# EAGLE board Micro_Bit_Controller_Bit-Panel_v21 (EAGLE 9.5.2)
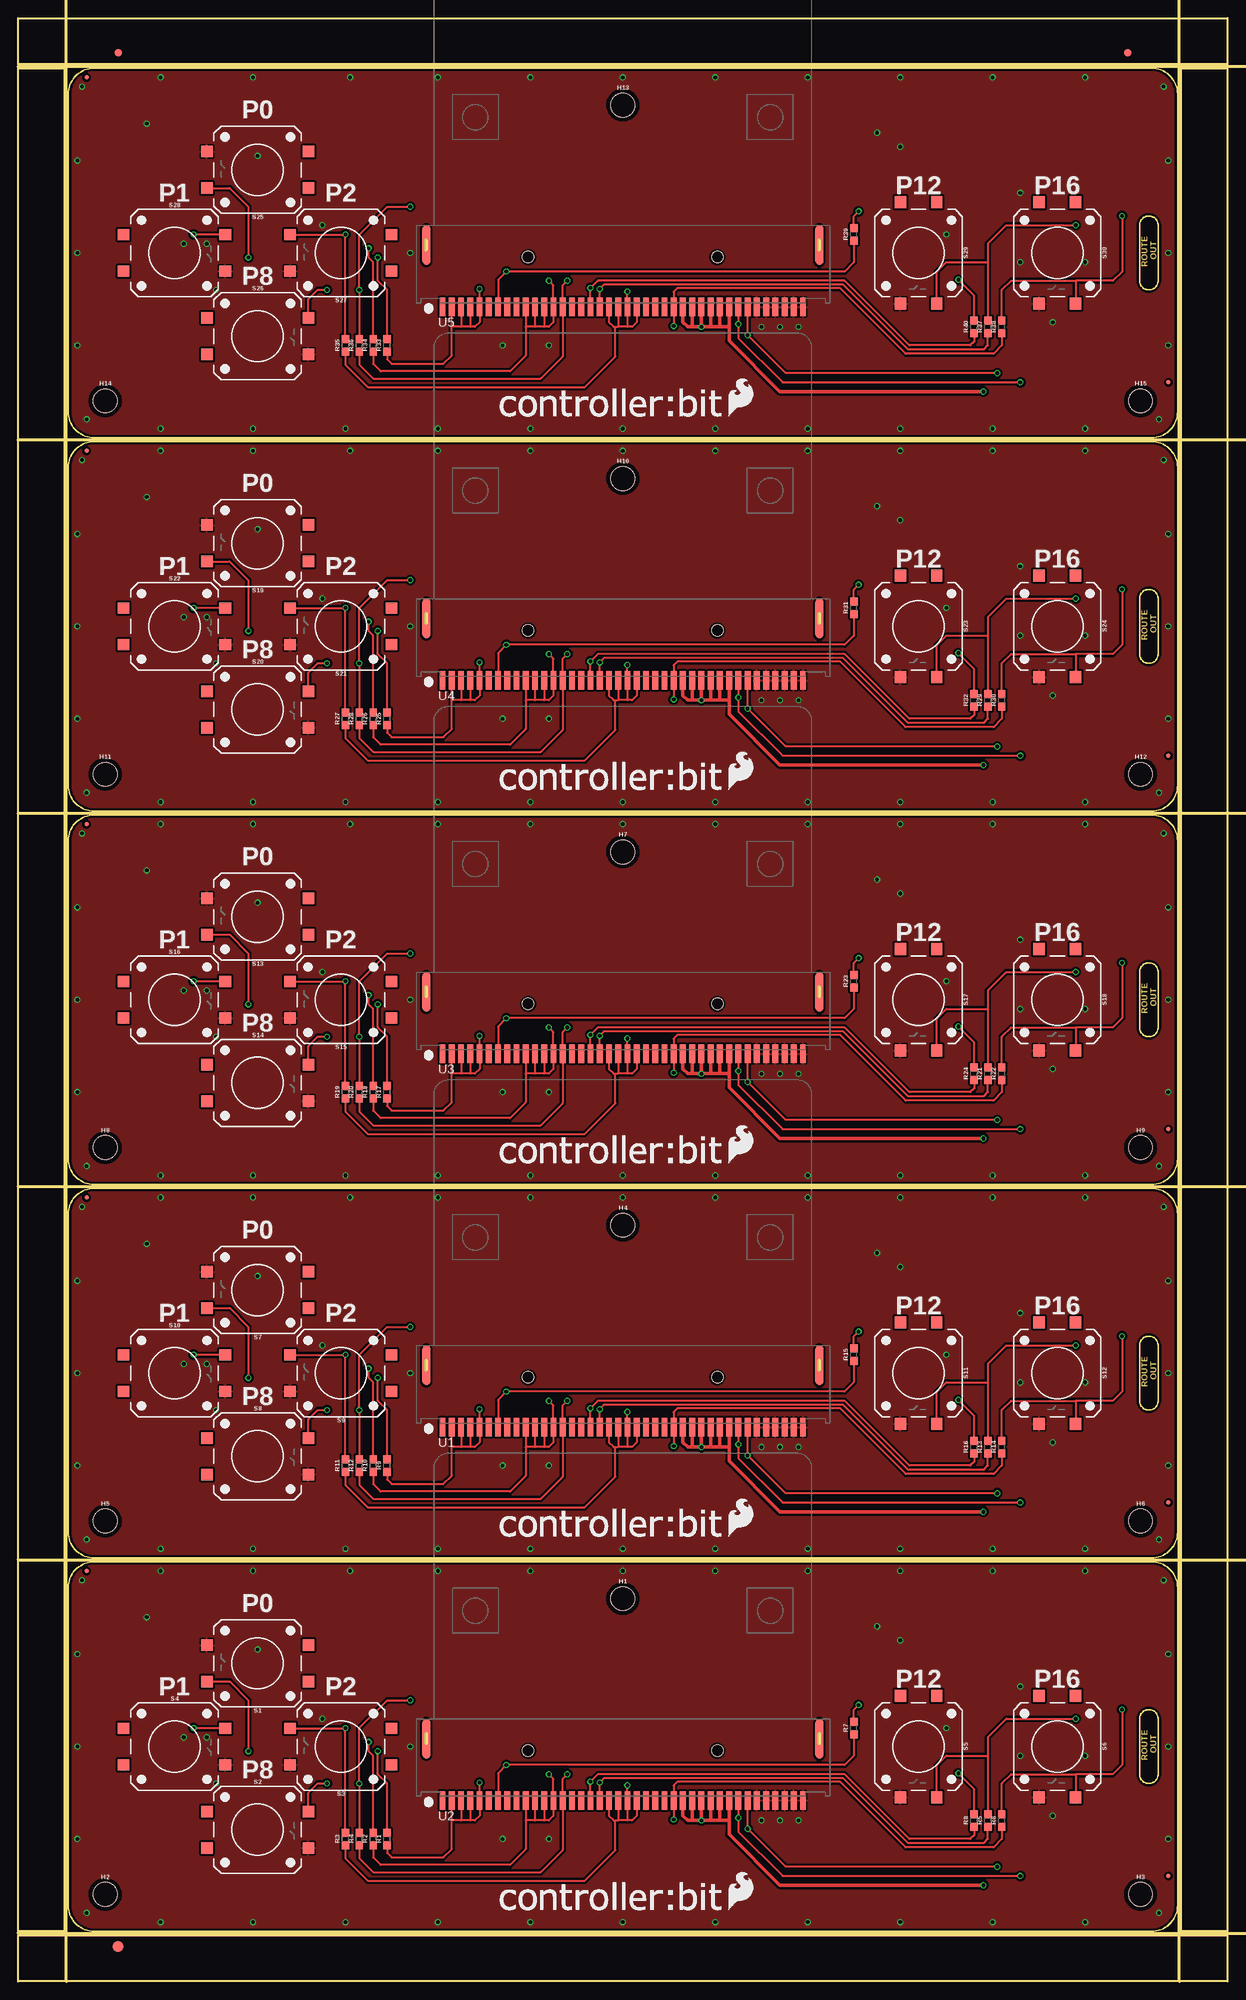
[diagram p0: board, top side]
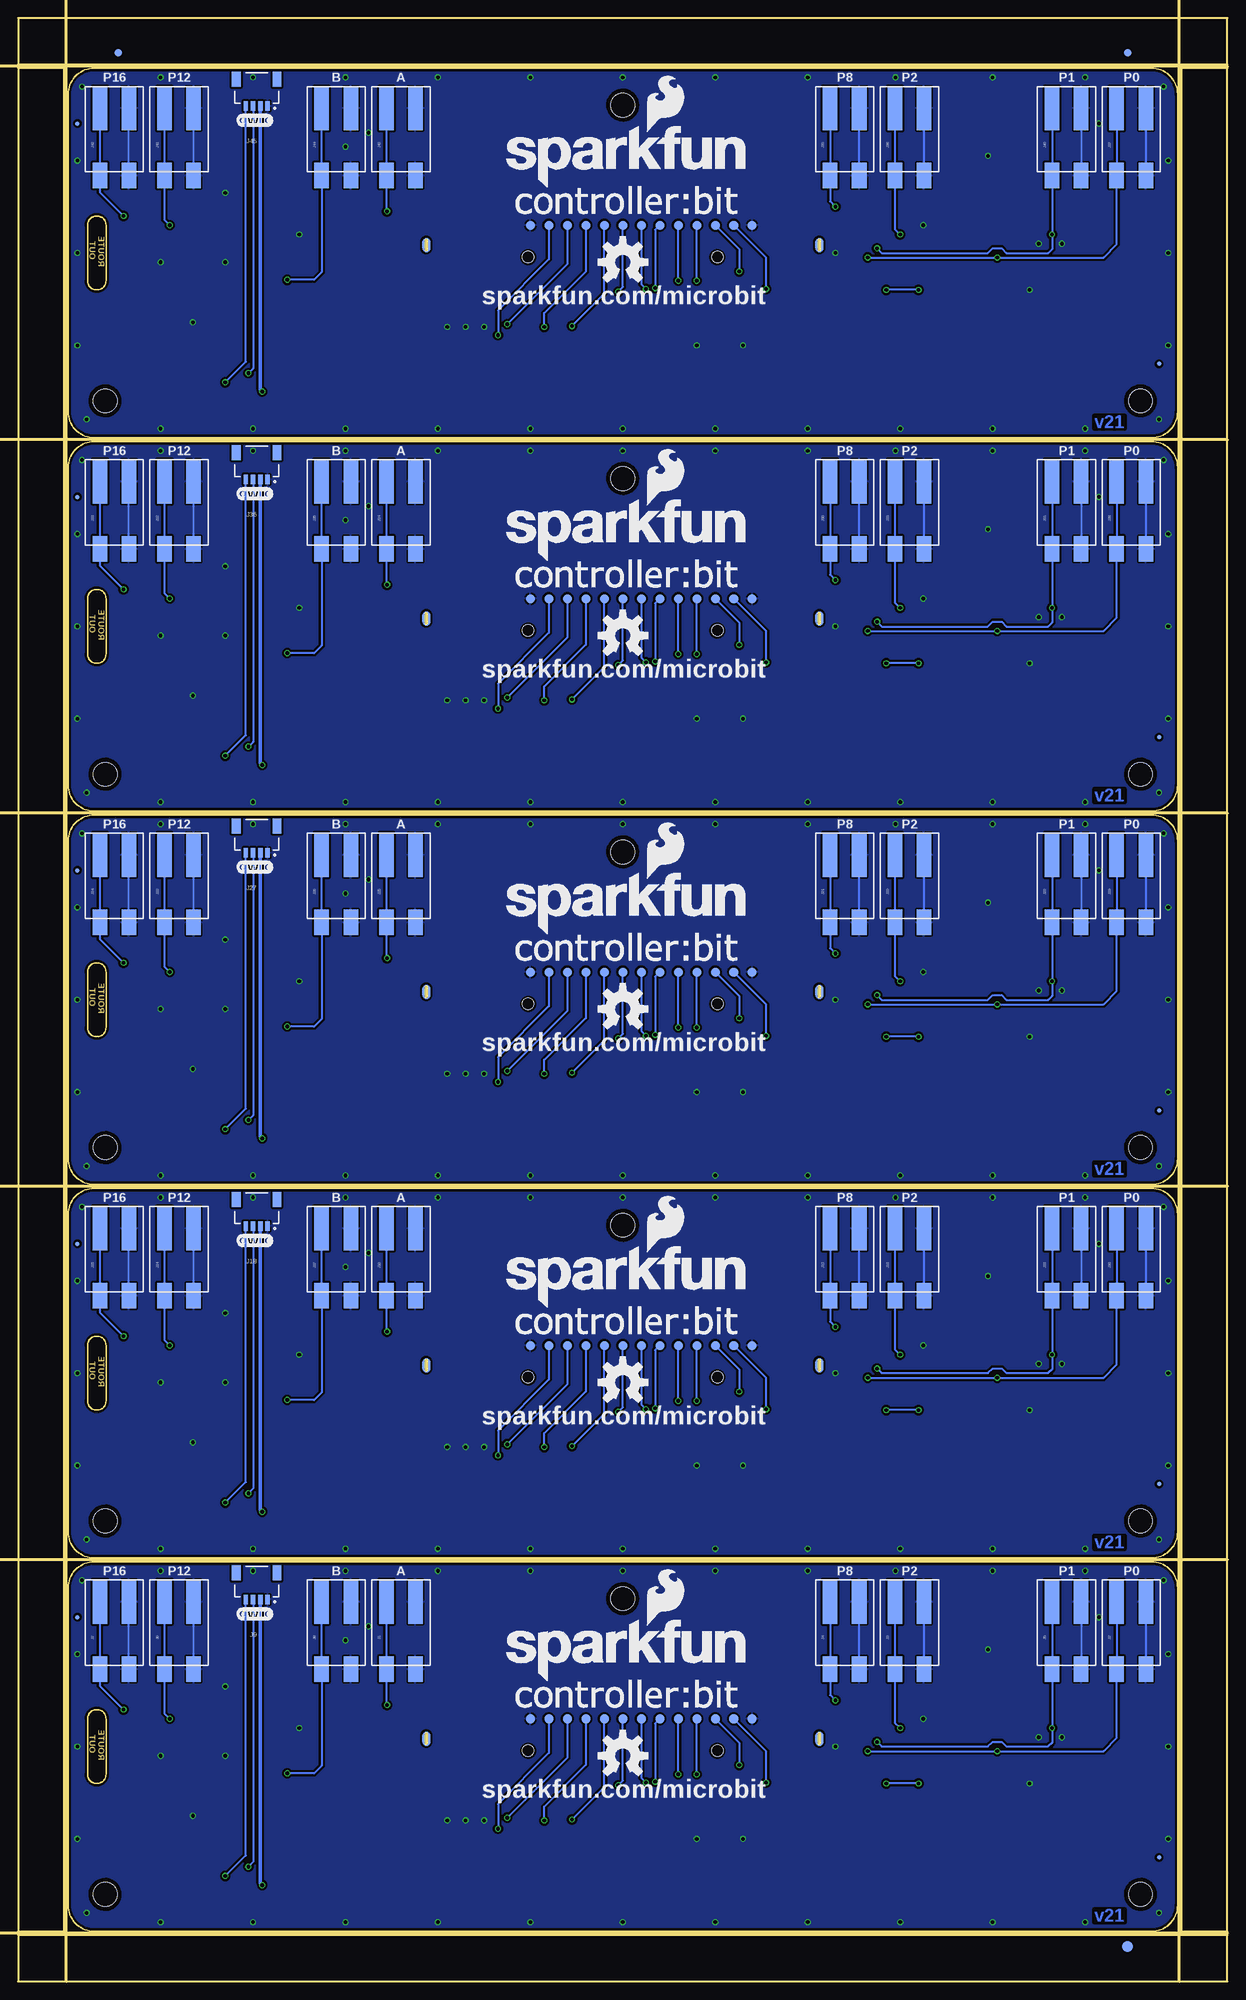
[diagram p1: board, bottom side, seen from below]

Size 166.12 x 269.75 mm. Coordinates in mm from the lower left corner, seen from the top.
Outline: 155.67,57.66 10.45,57.66 arc90 6.86,54.07 6.86,10.45 arc90 10.45,6.86 155.67,6.86 arc90 159.26,10.45 159.26,54.07 arc90 155.67,57.66
Outline: 156.59,36.07 156.59,28.45 arc-90 155.32,27.18 arc-90 154.05,28.45 154.05,36.07 arc-90 155.32,37.34 arc-90 156.59,36.07
Outline: 155.67,108.97 10.45,108.97 arc90 6.86,105.37 6.86,61.76 arc90 10.45,58.17 155.67,58.17 arc90 159.26,61.76 159.26,105.37 arc90 155.67,108.97
Outline: 156.59,87.38 156.59,79.76 arc-90 155.32,78.49 arc-90 154.05,79.76 154.05,87.38 arc-90 155.32,88.65 arc-90 156.59,87.38
Outline: 155.67,160.27 10.45,160.27 arc90 6.86,156.68 6.86,113.07 arc90 10.45,109.47 155.67,109.47 arc90 159.26,113.07 159.26,156.68 arc90 155.67,160.27
Outline: 156.59,138.68 156.59,131.06 arc-90 155.32,129.79 arc-90 154.05,131.06 154.05,138.68 arc-90 155.32,139.95 arc-90 156.59,138.68
Outline: 155.67,211.58 10.45,211.58 arc90 6.86,207.99 6.86,164.37 arc90 10.45,160.78 155.67,160.78 arc90 159.26,164.37 159.26,207.99 arc90 155.67,211.58
Outline: 156.59,189.99 156.59,182.37 arc-90 155.32,181.1 arc-90 154.05,182.37 154.05,189.99 arc-90 155.32,191.26 arc-90 156.59,189.99
Outline: 155.67,262.89 10.45,262.89 arc90 6.86,259.3 6.86,215.68 arc90 10.45,212.09 155.67,212.09 arc90 159.26,215.68 159.26,259.3 arc90 155.67,262.89
Outline: 156.59,241.3 156.59,233.68 arc-90 155.32,232.41 arc-90 154.05,233.68 154.05,241.3 arc-90 155.32,242.57 arc-90 156.59,241.3
Outline: 0,6.35 166.12,6.35 166.12,0 0,0 0,6.35
Outline: 159.77,262.89 166.12,262.89 166.12,6.86 159.77,6.86 159.77,262.89
Outline: 0,269.75 166.12,269.75 166.12,263.4 0,263.4 0,269.75
Outline: 0,262.89 6.35,262.89 6.35,6.86 0,6.86 0,262.89
Copper layers (1*16): Top 0.035mm / dielectric 1.5mm / Bottom 0.035mm
Design rules "SparkFun-2-layer-PCBWay-LIMIT": minimum track width 6mil, minimum drill 0.3mm, track to track 6mil, track to pad 6mil, pad to pad 6mil, via to via 6mil, smd to smd 6mil, copper to edge 6mil, drill to drill 6mil, minimum pad ring 6mil, minimum via ring 6mil, stop-mask expansion 4mil, vias tented up to drill 25mil, thermal gap 10mil
Milling: 8 lines

## Footprints (pad centres in the part's own frame; a part is rotated, then mirrored left to right if it is on the bottom)
FIDUCIAL-1X2 = smd 1 x 1: 1 0,0
FIDUCIAL-1.5X3 = smd 1.5 x 1.5: 1 0,0
FIDUCIAL-MICRO = smd 0.635 x 0.635: 1 0,0
STAND-OFF = hole 3.302: 0,0
1X02_POKEHOME = smd 3.5 x 2: P1 5.25,2; P2 5.25,-2 | smd 6 x 2: P3 -4,2; P4 -4,-2
JST04_1MM_RA = smd 0.6 x 1.35: 1 -1.5,0; 2 -0.5,0; 3 0.5,0; 4 1.5,0 | smd 1.2 x 2: NC1 2.8,-3.675; NC2 -2.8,-3.675
0603 = smd 1.1 x 1: 1 -0.85,0; 2 0.85,0
TACTILE_SWITCH_SMD_12MM = smd 1.6 x 1.55: 1 6.975,-2.5; 2 -6.975,-2.5; 3 6.975,2.5; 4 -6.975,2.5
PAD.03X.05 = smd 1.27 x 1.27: P$1 0,0
MICRO:BIT-RA_SMD = smd 0.8 x 2.5: P$1 -24.765,-6.15; P$2 -23.495,-6.15; P$3 -22.225,-6.15; P$4 -20.955,-6.15; P$5 -19.685,-6.15; P$6 -18.415,-6.15; P$7 -17.145,-6.15; P$8 -15.875,-6.15; P$9 -14.605,-6.15; P$10 -13.335,-6.15; P$11 -12.065,-6.15; P$12 -10.795,-6.15; P$13 -9.525,-6.15; P$14 -8.255,-6.15; P$15 -6.985,-6.15; P$16 -5.715,-6.15; P$17 -4.445,-6.15; P$18 -3.175,-6.15; P$19 -1.905,-6.15; P$20 -0.635,-6.15; P$21 0.635,-6.15; P$22 1.905,-6.15; P$23 3.175,-6.15; P$24 4.445,-6.15; P$25 5.715,-6.15; P$26 6.985,-6.15; P$27 8.255,-6.15; P$28 9.525,-6.15; P$29 10.795,-6.15; P$30 12.065,-6.15; P$31 13.335,-6.15; P$32 14.605,-6.15; P$33 15.875,-6.15; P$34 17.145,-6.15; P$35 18.415,-6.15; P$36 19.685,-6.15; P$37 20.955,-6.15; P$38 22.225,-6.15; P$39 23.495,-6.15; P$40 24.765,-6.15 | smd 1.1 x 5.5: P$42 -27,2.36; P$43 27,2.36 | smd 1.1 x 2 bottom: P$44 -27,2.36; P$45 27,2.36 | hole 1.6: 13,0.7; -13,0.7

## Placement (x,y rotation side)
E$1  [FIDUCIAL-1X2]  13.72,264.99 0 top
E$2  [FIDUCIAL-1X2]  13.72,264.99 0 bottom
E$3  [FIDUCIAL-1X2]  152.4,264.99 0 top
E$4  [FIDUCIAL-1X2]  152.4,264.99 0 bottom
E$5  [FIDUCIAL-1.5X3]  13.72,4.76 0 top
E$6  [FIDUCIAL-1.5X3]  13.72,4.76 0 bottom
FD1  FIDUCIALUFIDUCIAL  [FIDUCIAL-MICRO]  9.4,56.39 0 top
FD2  FIDUCIALUFIDUCIAL  [FIDUCIAL-MICRO]  157.99,14.48 0 top
FD3  FIDUCIALUFIDUCIAL  [FIDUCIAL-MICRO]  9.4,17.02 0 bottom
FD4  FIDUCIALUFIDUCIAL  [FIDUCIAL-MICRO]  157.99,50.04 0 bottom
FD5  FIDUCIALUFIDUCIAL  [FIDUCIAL-MICRO]  9.4,107.7 0 top
FD6  FIDUCIALUFIDUCIAL  [FIDUCIAL-MICRO]  157.99,65.79 0 top
FD7  FIDUCIALUFIDUCIAL  [FIDUCIAL-MICRO]  9.4,68.33 0 bottom
FD8  FIDUCIALUFIDUCIAL  [FIDUCIAL-MICRO]  157.99,101.35 0 bottom
FD9  FIDUCIALUFIDUCIAL  [FIDUCIAL-MICRO]  9.4,159 0 top
FD10  FIDUCIALUFIDUCIAL  [FIDUCIAL-MICRO]  157.99,117.09 0 top
FD11  FIDUCIALUFIDUCIAL  [FIDUCIAL-MICRO]  9.4,119.63 0 bottom
FD12  FIDUCIALUFIDUCIAL  [FIDUCIAL-MICRO]  157.99,152.65 0 bottom
FD13  FIDUCIALUFIDUCIAL  [FIDUCIAL-MICRO]  9.4,210.31 0 top
FD14  FIDUCIALUFIDUCIAL  [FIDUCIAL-MICRO]  157.99,168.4 0 top
FD15  FIDUCIALUFIDUCIAL  [FIDUCIAL-MICRO]  9.4,170.94 0 bottom
FD16  FIDUCIALUFIDUCIAL  [FIDUCIAL-MICRO]  157.99,203.96 0 bottom
FD17  FIDUCIALUFIDUCIAL  [FIDUCIAL-MICRO]  9.4,261.62 0 top
FD18  FIDUCIALUFIDUCIAL  [FIDUCIAL-MICRO]  157.99,219.71 0 top
FD19  FIDUCIALUFIDUCIAL  [FIDUCIAL-MICRO]  9.4,222.25 0 bottom
FD20  FIDUCIALUFIDUCIAL  [FIDUCIAL-MICRO]  157.99,255.27 0 bottom
H1  STAND-OFF  [STAND-OFF]  83.06,52.58 0 top
H2  STAND-OFF  [STAND-OFF]  11.94,11.94 0 top
H3  STAND-OFF  [STAND-OFF]  154.18,11.94 0 top
H4  STAND-OFF  [STAND-OFF]  83.06,103.89 0 top
H5  STAND-OFF  [STAND-OFF]  11.94,63.25 0 top
H6  STAND-OFF  [STAND-OFF]  154.18,63.25 0 top
H7  STAND-OFF  [STAND-OFF]  83.06,155.19 0 top
H8  STAND-OFF  [STAND-OFF]  11.94,114.55 0 top
H9  STAND-OFF  [STAND-OFF]  154.18,114.55 0 top
H10  STAND-OFF  [STAND-OFF]  83.06,206.5 0 top
H11  STAND-OFF  [STAND-OFF]  11.94,165.86 0 top
H12  STAND-OFF  [STAND-OFF]  154.18,165.86 0 top
H13  STAND-OFF  [STAND-OFF]  83.06,257.81 0 top
H14  STAND-OFF  [STAND-OFF]  11.94,217.17 0 top
H15  STAND-OFF  [STAND-OFF]  154.18,217.17 0 top
J1  Pokehome  [1X02_POKEHOME]  113.54,48.13 270 bottom
J2  Pokehome  [1X02_POKEHOME]  13.21,48.13 270 bottom
J3  Pokehome  [1X02_POKEHOME]  43.69,48.13 270 bottom
J4  Pokehome  [1X02_POKEHOME]  52.58,48.13 270 bottom
J5  Pokehome  [1X02_POKEHOME]  22.1,48.13 270 bottom
J6  Pokehome  [1X02_POKEHOME]  144.02,48.13 270 bottom
J7  Pokehome  [1X02_POKEHOME]  152.91,48.13 270 bottom
J8  Pokehome  [1X02_POKEHOME]  122.43,48.13 270 bottom
J9  QWIIC_RA  [JST04_1MM_RA]  133.35,52.45 180 bottom
J10  Pokehome  [1X02_POKEHOME]  13.21,99.44 270 bottom
J11  Pokehome  [1X02_POKEHOME]  43.69,99.44 270 bottom
J12  Pokehome  [1X02_POKEHOME]  52.58,99.44 270 bottom
J13  Pokehome  [1X02_POKEHOME]  22.1,99.44 270 bottom
J14  Pokehome  [1X02_POKEHOME]  144.02,99.44 270 bottom
J15  Pokehome  [1X02_POKEHOME]  152.91,99.44 270 bottom
J16  Pokehome  [1X02_POKEHOME]  113.54,99.44 270 bottom
J17  Pokehome  [1X02_POKEHOME]  122.43,99.44 270 bottom
J18  QWIIC_RA  [JST04_1MM_RA]  133.35,103.76 180 bottom
J19  Pokehome  [1X02_POKEHOME]  13.21,150.75 270 bottom
J20  Pokehome  [1X02_POKEHOME]  43.69,150.75 270 bottom
J21  Pokehome  [1X02_POKEHOME]  52.58,150.75 270 bottom
J22  Pokehome  [1X02_POKEHOME]  22.1,150.75 270 bottom
J23  Pokehome  [1X02_POKEHOME]  144.02,150.75 270 bottom
J24  Pokehome  [1X02_POKEHOME]  152.91,150.75 270 bottom
J25  Pokehome  [1X02_POKEHOME]  113.54,150.75 270 bottom
J26  Pokehome  [1X02_POKEHOME]  122.43,150.75 270 bottom
J27  QWIIC_RA  [JST04_1MM_RA]  133.35,155.07 180 bottom
J28  Pokehome  [1X02_POKEHOME]  13.21,202.06 270 bottom
J29  Pokehome  [1X02_POKEHOME]  43.69,202.06 270 bottom
J30  Pokehome  [1X02_POKEHOME]  52.58,202.06 270 bottom
J31  Pokehome  [1X02_POKEHOME]  22.1,202.06 270 bottom
J32  Pokehome  [1X02_POKEHOME]  144.02,202.06 270 bottom
J33  Pokehome  [1X02_POKEHOME]  152.91,202.06 270 bottom
J34  Pokehome  [1X02_POKEHOME]  113.54,202.06 270 bottom
J35  Pokehome  [1X02_POKEHOME]  122.43,202.06 270 bottom
J36  QWIIC_RA  [JST04_1MM_RA]  133.35,206.38 180 bottom
J37  Pokehome  [1X02_POKEHOME]  13.21,253.37 270 bottom
J38  Pokehome  [1X02_POKEHOME]  43.69,253.37 270 bottom
J39  Pokehome  [1X02_POKEHOME]  52.58,253.37 270 bottom
J40  Pokehome  [1X02_POKEHOME]  22.1,253.37 270 bottom
J41  Pokehome  [1X02_POKEHOME]  144.02,253.37 270 bottom
J42  Pokehome  [1X02_POKEHOME]  152.91,253.37 270 bottom
J43  Pokehome  [1X02_POKEHOME]  113.54,253.37 270 bottom
J44  Pokehome  [1X02_POKEHOME]  122.43,253.37 270 bottom
J45  QWIIC_RA  [JST04_1MM_RA]  133.35,257.68 180 bottom
LOGO1  SFE_LOGO_FLAME.2_INCH  [SFE_LOGO_FLAME_.2]  97.25,9.59 0 top
LOGO2  OSHW-LOGOL  [OSHW-LOGO-L]  83.06,30.99 0 bottom
LOGO3  SFE_LOGO_NAME_FLAME.3_INCH  [SFE_LOGO_NAME_FLAME_.3]  99.57,41.15 0 bottom
LOGO4  SFE_LOGO_FLAME.2_INCH  [SFE_LOGO_FLAME_.2]  97.25,60.9 0 top
LOGO5  OSHW-LOGOL  [OSHW-LOGO-L]  83.06,82.3 0 bottom
LOGO6  SFE_LOGO_NAME_FLAME.3_INCH  [SFE_LOGO_NAME_FLAME_.3]  99.57,92.46 0 bottom
LOGO7  SFE_LOGO_FLAME.2_INCH  [SFE_LOGO_FLAME_.2]  97.25,112.2 0 top
LOGO8  OSHW-LOGOL  [OSHW-LOGO-L]  83.06,133.6 0 bottom
LOGO9  SFE_LOGO_NAME_FLAME.3_INCH  [SFE_LOGO_NAME_FLAME_.3]  99.57,143.76 0 bottom
LOGO10  SFE_LOGO_FLAME.2_INCH  [SFE_LOGO_FLAME_.2]  97.25,163.51 0 top
LOGO11  OSHW-LOGOL  [OSHW-LOGO-L]  83.06,184.91 0 bottom
LOGO12  SFE_LOGO_NAME_FLAME.3_INCH  [SFE_LOGO_NAME_FLAME_.3]  99.57,195.07 0 bottom
LOGO13  SFE_LOGO_FLAME.2_INCH  [SFE_LOGO_FLAME_.2]  97.25,214.82 0 top
LOGO14  OSHW-LOGOL  [OSHW-LOGO-L]  83.06,236.22 0 bottom
LOGO15  SFE_LOGO_NAME_FLAME.3_INCH  [SFE_LOGO_NAME_FLAME_.3]  99.57,246.38 0 bottom
R1  2.2k  [0603]  50.67,19.56 90 top
R2  2.2k  [0603]  48.77,19.56 90 top
R3  2.2k  [0603]  44.96,19.56 90 top
R4  2.2k  [0603]  46.86,19.56 90 top
R5  2.2k  [0603]  133.22,22.1 90 top
R6  2.2k  [0603]  135.13,22.1 90 top
R7  2.2k  [0603]  114.81,34.8 90 top
R8  2.2k  [0603]  131.32,22.1 90 top
R9  2.2k  [0603]  50.67,70.87 90 top
R10  2.2k  [0603]  48.77,70.87 90 top
R11  2.2k  [0603]  44.96,70.87 90 top
R12  2.2k  [0603]  46.86,70.87 90 top
R13  2.2k  [0603]  133.22,73.41 90 top
R14  2.2k  [0603]  135.13,73.41 90 top
R15  2.2k  [0603]  114.81,86.11 90 top
R16  2.2k  [0603]  131.32,73.41 90 top
R17  2.2k  [0603]  50.67,122.17 90 top
R18  2.2k  [0603]  48.77,122.17 90 top
R19  2.2k  [0603]  44.96,122.17 90 top
R20  2.2k  [0603]  46.86,122.17 90 top
R21  2.2k  [0603]  133.22,124.71 90 top
R22  2.2k  [0603]  135.13,124.71 90 top
R23  2.2k  [0603]  114.81,137.41 90 top
R24  2.2k  [0603]  131.32,124.71 90 top
R25  2.2k  [0603]  50.67,173.48 90 top
R26  2.2k  [0603]  48.77,173.48 90 top
R27  2.2k  [0603]  44.96,173.48 90 top
R28  2.2k  [0603]  46.86,173.48 90 top
R29  2.2k  [0603]  133.22,176.02 90 top
R30  2.2k  [0603]  135.13,176.02 90 top
R31  2.2k  [0603]  114.81,188.72 90 top
R32  2.2k  [0603]  131.32,176.02 90 top
R33  2.2k  [0603]  50.67,224.79 90 top
R34  2.2k  [0603]  48.77,224.79 90 top
R35  2.2k  [0603]  44.96,224.79 90 top
R36  2.2k  [0603]  46.86,224.79 90 top
R37  2.2k  [0603]  133.22,227.33 90 top
R38  2.2k  [0603]  135.13,227.33 90 top
R39  2.2k  [0603]  114.81,240.03 90 top
R40  2.2k  [0603]  131.32,227.33 90 top
S1  TACT  [TACTILE_SWITCH_SMD_12MM]  32.89,43.69 180 top
S2  TACT  [TACTILE_SWITCH_SMD_12MM]  32.89,20.83 0 top
S3  TACT  [TACTILE_SWITCH_SMD_12MM]  44.32,32.26 180 top
S4  TACT  [TACTILE_SWITCH_SMD_12MM]  21.46,32.26 0 top
S5  TACT  [TACTILE_SWITCH_SMD_12MM]  123.7,32.26 270 top
S6  TACT  [TACTILE_SWITCH_SMD_12MM]  142.75,32.26 270 top
S7  TACT  [TACTILE_SWITCH_SMD_12MM]  32.89,95 180 top
S8  TACT  [TACTILE_SWITCH_SMD_12MM]  32.89,72.14 0 top
S9  TACT  [TACTILE_SWITCH_SMD_12MM]  44.32,83.57 180 top
S10  TACT  [TACTILE_SWITCH_SMD_12MM]  21.46,83.57 0 top
S11  TACT  [TACTILE_SWITCH_SMD_12MM]  123.7,83.57 270 top
S12  TACT  [TACTILE_SWITCH_SMD_12MM]  142.75,83.57 270 top
S13  TACT  [TACTILE_SWITCH_SMD_12MM]  32.89,146.3 180 top
S14  TACT  [TACTILE_SWITCH_SMD_12MM]  32.89,123.44 0 top
S15  TACT  [TACTILE_SWITCH_SMD_12MM]  44.32,134.87 180 top
S16  TACT  [TACTILE_SWITCH_SMD_12MM]  21.46,134.87 0 top
S17  TACT  [TACTILE_SWITCH_SMD_12MM]  123.7,134.87 270 top
S18  TACT  [TACTILE_SWITCH_SMD_12MM]  142.75,134.87 270 top
S19  TACT  [TACTILE_SWITCH_SMD_12MM]  32.89,197.61 180 top
S20  TACT  [TACTILE_SWITCH_SMD_12MM]  32.89,174.75 0 top
S21  TACT  [TACTILE_SWITCH_SMD_12MM]  44.32,186.18 180 top
S22  TACT  [TACTILE_SWITCH_SMD_12MM]  21.46,186.18 0 top
S23  TACT  [TACTILE_SWITCH_SMD_12MM]  123.7,186.18 270 top
S24  TACT  [TACTILE_SWITCH_SMD_12MM]  142.75,186.18 270 top
S25  TACT  [TACTILE_SWITCH_SMD_12MM]  32.89,248.92 180 top
S26  TACT  [TACTILE_SWITCH_SMD_12MM]  32.89,226.06 0 top
S27  TACT  [TACTILE_SWITCH_SMD_12MM]  44.32,237.49 180 top
S28  TACT  [TACTILE_SWITCH_SMD_12MM]  21.46,237.49 0 top
S29  TACT  [TACTILE_SWITCH_SMD_12MM]  123.7,237.49 270 top
S30  TACT  [TACTILE_SWITCH_SMD_12MM]  142.75,237.49 270 top
TP1  TEST-POINT3X5  [PAD.03X.05]  88.14,36.07 90 bottom
TP2  TEST-POINT3X5  [PAD.03X.05]  95.76,36.07 90 bottom
TP3  TEST-POINT3X5  [PAD.03X.05]  65.28,36.07 90 bottom
TP4  TEST-POINT3X5  [PAD.03X.05]  93.22,36.07 90 bottom
TP5  TEST-POINT3X5  [PAD.03X.05]  90.68,36.07 90 bottom
TP6  TEST-POINT3X5  [PAD.03X.05]  85.6,36.07 90 bottom
TP7  TEST-POINT3X5  [PAD.03X.05]  83.06,36.07 90 bottom
TP8  TEST-POINT3X5  [PAD.03X.05]  80.52,36.07 90 bottom
TP9  TEST-POINT3X5  [PAD.03X.05]  77.98,36.07 90 bottom
TP10  TEST-POINT3X5  [PAD.03X.05]  75.44,36.07 90 bottom
TP11  TEST-POINT3X5  [PAD.03X.05]  72.9,36.07 90 bottom
TP12  TEST-POINT3X5  [PAD.03X.05]  70.36,36.07 90 bottom
TP13  TEST-POINT3X5  [PAD.03X.05]  67.82,36.07 90 bottom
TP14  TEST-POINT3X5  [PAD.03X.05]  88.14,87.38 90 bottom
TP15  TEST-POINT3X5  [PAD.03X.05]  95.76,87.38 90 bottom
TP16  TEST-POINT3X5  [PAD.03X.05]  65.28,87.38 90 bottom
TP17  TEST-POINT3X5  [PAD.03X.05]  93.22,87.38 90 bottom
TP18  TEST-POINT3X5  [PAD.03X.05]  90.68,87.38 90 bottom
TP19  TEST-POINT3X5  [PAD.03X.05]  85.6,87.38 90 bottom
TP20  TEST-POINT3X5  [PAD.03X.05]  83.06,87.38 90 bottom
TP21  TEST-POINT3X5  [PAD.03X.05]  80.52,87.38 90 bottom
TP22  TEST-POINT3X5  [PAD.03X.05]  77.98,87.38 90 bottom
TP23  TEST-POINT3X5  [PAD.03X.05]  75.44,87.38 90 bottom
TP24  TEST-POINT3X5  [PAD.03X.05]  72.9,87.38 90 bottom
TP25  TEST-POINT3X5  [PAD.03X.05]  70.36,87.38 90 bottom
TP26  TEST-POINT3X5  [PAD.03X.05]  67.82,87.38 90 bottom
TP27  TEST-POINT3X5  [PAD.03X.05]  88.14,138.68 90 bottom
TP28  TEST-POINT3X5  [PAD.03X.05]  95.76,138.68 90 bottom
TP29  TEST-POINT3X5  [PAD.03X.05]  65.28,138.68 90 bottom
TP30  TEST-POINT3X5  [PAD.03X.05]  93.22,138.68 90 bottom
TP31  TEST-POINT3X5  [PAD.03X.05]  90.68,138.68 90 bottom
TP32  TEST-POINT3X5  [PAD.03X.05]  85.6,138.68 90 bottom
TP33  TEST-POINT3X5  [PAD.03X.05]  83.06,138.68 90 bottom
TP34  TEST-POINT3X5  [PAD.03X.05]  80.52,138.68 90 bottom
TP35  TEST-POINT3X5  [PAD.03X.05]  77.98,138.68 90 bottom
TP36  TEST-POINT3X5  [PAD.03X.05]  75.44,138.68 90 bottom
TP37  TEST-POINT3X5  [PAD.03X.05]  72.9,138.68 90 bottom
TP38  TEST-POINT3X5  [PAD.03X.05]  70.36,138.68 90 bottom
TP39  TEST-POINT3X5  [PAD.03X.05]  67.82,138.68 90 bottom
TP40  TEST-POINT3X5  [PAD.03X.05]  88.14,189.99 90 bottom
TP41  TEST-POINT3X5  [PAD.03X.05]  95.76,189.99 90 bottom
TP42  TEST-POINT3X5  [PAD.03X.05]  65.28,189.99 90 bottom
TP43  TEST-POINT3X5  [PAD.03X.05]  93.22,189.99 90 bottom
TP44  TEST-POINT3X5  [PAD.03X.05]  90.68,189.99 90 bottom
TP45  TEST-POINT3X5  [PAD.03X.05]  85.6,189.99 90 bottom
TP46  TEST-POINT3X5  [PAD.03X.05]  83.06,189.99 90 bottom
TP47  TEST-POINT3X5  [PAD.03X.05]  80.52,189.99 90 bottom
TP48  TEST-POINT3X5  [PAD.03X.05]  77.98,189.99 90 bottom
TP49  TEST-POINT3X5  [PAD.03X.05]  75.44,189.99 90 bottom
TP50  TEST-POINT3X5  [PAD.03X.05]  72.9,189.99 90 bottom
TP51  TEST-POINT3X5  [PAD.03X.05]  70.36,189.99 90 bottom
TP52  TEST-POINT3X5  [PAD.03X.05]  67.82,189.99 90 bottom
TP53  TEST-POINT3X5  [PAD.03X.05]  88.14,241.3 90 bottom
TP54  TEST-POINT3X5  [PAD.03X.05]  95.76,241.3 90 bottom
TP55  TEST-POINT3X5  [PAD.03X.05]  65.28,241.3 90 bottom
TP56  TEST-POINT3X5  [PAD.03X.05]  93.22,241.3 90 bottom
TP57  TEST-POINT3X5  [PAD.03X.05]  90.68,241.3 90 bottom
TP58  TEST-POINT3X5  [PAD.03X.05]  85.6,241.3 90 bottom
TP59  TEST-POINT3X5  [PAD.03X.05]  83.06,241.3 90 bottom
TP60  TEST-POINT3X5  [PAD.03X.05]  80.52,241.3 90 bottom
TP61  TEST-POINT3X5  [PAD.03X.05]  77.98,241.3 90 bottom
TP62  TEST-POINT3X5  [PAD.03X.05]  75.44,241.3 90 bottom
TP63  TEST-POINT3X5  [PAD.03X.05]  72.9,241.3 90 bottom
TP64  TEST-POINT3X5  [PAD.03X.05]  70.36,241.3 90 bottom
TP65  TEST-POINT3X5  [PAD.03X.05]  67.82,241.3 90 bottom
U1  micro:bit  [MICRO:BIT-RA_SMD]  83.06,82.3 0 top
U2  micro:bit  [MICRO:BIT-RA_SMD]  83.06,30.99 0 top
U3  micro:bit  [MICRO:BIT-RA_SMD]  83.06,133.6 0 top
U4  micro:bit  [MICRO:BIT-RA_SMD]  83.06,184.91 0 top
U5  micro:bit  [MICRO:BIT-RA_SMD]  83.06,236.22 0 top
U$1  [QWIIC_5MM]  133.63,101.8 0 bottom
U$2  [QWIIC_5MM]  133.63,50.5 0 bottom
U$3  LOGO-CONTROLLER_BIT  [LOGO-CONTROLLER_BIT]  66.04,9.78 0 top
U$4  LOGO-CONTROLLER_BIT  [LOGO-CONTROLLER_BIT]  66.04,61.09 0 top
U$5  LOGO-CONTROLLER_BIT  [LOGO-CONTROLLER_BIT]  97.92,88.9 0 bottom
U$6  LOGO-CONTROLLER_BIT  [LOGO-CONTROLLER_BIT]  97.92,37.59 0 bottom
U$7  [QWIIC_5MM]  133.63,153.11 0 bottom
U$8  LOGO-CONTROLLER_BIT  [LOGO-CONTROLLER_BIT]  66.04,112.4 0 top
U$9  LOGO-CONTROLLER_BIT  [LOGO-CONTROLLER_BIT]  97.92,140.21 0 bottom
U$10  [QWIIC_5MM]  133.63,204.42 0 bottom
U$11  LOGO-CONTROLLER_BIT  [LOGO-CONTROLLER_BIT]  66.04,163.7 0 top
U$12  LOGO-CONTROLLER_BIT  [LOGO-CONTROLLER_BIT]  97.92,191.52 0 bottom
U$13  [QWIIC_5MM]  133.63,255.73 0 bottom
U$14  LOGO-CONTROLLER_BIT  [LOGO-CONTROLLER_BIT]  66.04,215.01 0 top
U$15  LOGO-CONTROLLER_BIT  [LOGO-CONTROLLER_BIT]  97.92,242.82 0 bottom

## Library data of the parts
E$1-E$4 FD1-FD20 LOGO1-LOGO15 U$1-U$15 = SparkFun-Aesthetics
E$5 E$6 = SparkFun-Retired
H1-H15 = SparkFun-Hardware
J1-J8 J10-J17 J19-J26 J28-J35 J37-J44 = SparkFun-Connectors; PROD_ID: CONN-13512
J9 J18 J27 J36 J45 = SparkFun-Connectors; PROD_ID: CONN-13694; VALUE: QWIIC_RIGHT_ANGLE
R1-R40 = SparkFun-Resistors; PROD_ID: RES-08272
S1-S30 = SparkFun-Switches; PROD_ID: SWCH-11967; SF_SKU: COM-12993
TP1-TP65 = SparkFun-Connectors
U1-U5 = SparkFun-Connectors; PROD_ID: CONN-14679

## Nets
3.3V: J9.2 TP1.P$1 U2.P$27 U2.P$28 U2.P$29 U2.P$30 U2.P$31 U2.P$32
3.3V1: J18.2 TP14.P$1 U1.P$27 U1.P$28 U1.P$29 U1.P$30 U1.P$31 U1.P$32
3.3V2: J27.2 TP27.P$1 U3.P$27 U3.P$28 U3.P$29 U3.P$30 U3.P$31 U3.P$32
3.3V3: J36.2 TP40.P$1 U4.P$27 U4.P$28 U4.P$29 U4.P$30 U4.P$31 U4.P$32
3.3V4: J45.2 TP53.P$1 U5.P$27 U5.P$28 U5.P$29 U5.P$30 U5.P$31 U5.P$32
BTN_A: R7.1 TP12.P$1 U2.P$7
BTN_A1: R15.1 TP25.P$1 U1.P$7
BTN_A2: R23.1 TP38.P$1 U3.P$7
BTN_A3: R31.1 TP51.P$1 U4.P$7
BTN_A4: R39.1 TP64.P$1 U5.P$7
BTN_B: R8.1 TP9.P$1 U2.P$17
BTN_B1: R16.1 TP22.P$1 U1.P$17
BTN_B2: R24.1 TP35.P$1 U3.P$17
BTN_B3: R32.1 TP48.P$1 U4.P$17
BTN_B4: R40.1 TP61.P$1 U5.P$17
BTN_DN: R4.1 TP10.P$1 U2.P$14
BTN_DN1: R12.1 TP23.P$1 U1.P$14
BTN_DN2: R20.1 TP36.P$1 U3.P$14
BTN_DN3: R28.1 TP49.P$1 U4.P$14
BTN_DN4: R36.1 TP62.P$1 U5.P$14
BTN_L: R2.1 TP11.P$1 U2.P$10 U2.P$11 U2.P$12 U2.P$13
BTN_L1: R10.1 TP24.P$1 U1.P$10 U1.P$11 U1.P$12 U1.P$13
BTN_L2: R18.1 TP37.P$1 U3.P$10 U3.P$11 U3.P$12 U3.P$13
BTN_L3: R26.1 TP50.P$1 U4.P$10 U4.P$11 U4.P$12 U4.P$13
BTN_L4: R34.1 TP63.P$1 U5.P$10 U5.P$11 U5.P$12 U5.P$13
BTN_P1: R14.1 TP19.P$1 U1.P$26
BTN_P2: R13.1 TP21.P$1 U1.P$18
BTN_P3: R22.1 TP32.P$1 U3.P$26
BTN_P4: R21.1 TP34.P$1 U3.P$18
BTN_P5: R30.1 TP45.P$1 U4.P$26
BTN_P6: R29.1 TP47.P$1 U4.P$18
BTN_P7: R38.1 TP58.P$1 U5.P$26
BTN_P8: R37.1 TP60.P$1 U5.P$18
BTN_P12: R5.1 TP8.P$1 U2.P$18
BTN_P16: R6.1 TP6.P$1 U2.P$26
BTN_R: R3.1 TP7.P$1 U2.P$19 U2.P$20 U2.P$21 U2.P$22
BTN_R1: R11.1 TP20.P$1 U1.P$19 U1.P$20 U1.P$21 U1.P$22
BTN_R2: R19.1 TP33.P$1 U3.P$19 U3.P$20 U3.P$21 U3.P$22
BTN_R3: R27.1 TP46.P$1 U4.P$19 U4.P$20 U4.P$21 U4.P$22
BTN_R4: R35.1 TP59.P$1 U5.P$19 U5.P$20 U5.P$21 U5.P$22
BTN_UP: R1.1 TP13.P$1 U2.P$2 U2.P$3 U2.P$4 U2.P$5
BTN_UP1: R9.1 TP26.P$1 U1.P$2 U1.P$3 U1.P$4 U1.P$5
BTN_UP2: R17.1 TP39.P$1 U3.P$2 U3.P$3 U3.P$4 U3.P$5
BTN_UP3: R25.1 TP52.P$1 U4.P$2 U4.P$3 U4.P$4 U4.P$5
BTN_UP4: R33.1 TP65.P$1 U5.P$2 U5.P$3 U5.P$4 U5.P$5
GND: J1.P1 J1.P3 J2.P1 J2.P3 J3.P1 J3.P3 J4.P1 J4.P3 J5.P1 J5.P3 J6.P1 J6.P3 J7.P1 J7.P3 J8.P1 J8.P3 J9.1 S1.1 S2.1 S3.3 S4.1 S5.1 S6.1 TP2.P$1 TP3.P$1 U2.P$35 U2.P$36 U2.P$37 U2.P$38 U2.P$39 U2.P$40
GND1: J10.P1 J10.P3 J11.P1 J11.P3 J12.P1 J12.P3 J13.P1 J13.P3 J14.P1 J14.P3 J15.P1 J15.P3 J16.P1 J16.P3 J17.P1 J17.P3 J18.1 S7.1 S8.1 S9.3 S10.1 S11.1 S12.1 TP15.P$1 TP16.P$1 U1.P$35 U1.P$36 U1.P$37 U1.P$38 U1.P$39 U1.P$40
GND2: J19.P1 J19.P3 J20.P1 J20.P3 J21.P1 J21.P3 J22.P1 J22.P3 J23.P1 J23.P3 J24.P1 J24.P3 J25.P1 J25.P3 J26.P1 J26.P3 J27.1 S13.1 S14.1 S15.3 S16.1 S17.1 S18.1 TP28.P$1 TP29.P$1 U3.P$35 U3.P$36 U3.P$37 U3.P$38 U3.P$39 U3.P$40
GND3: J28.P1 J28.P3 J29.P1 J29.P3 J30.P1 J30.P3 J31.P1 J31.P3 J32.P1 J32.P3 J33.P1 J33.P3 J34.P1 J34.P3 J35.P1 J35.P3 J36.1 S19.1 S20.1 S21.3 S22.1 S23.1 S24.1 TP41.P$1 TP42.P$1 U4.P$35 U4.P$36 U4.P$37 U4.P$38 U4.P$39 U4.P$40
GND4: J37.P1 J37.P3 J38.P1 J38.P3 J39.P1 J39.P3 J40.P1 J40.P3 J41.P1 J41.P3 J42.P1 J42.P3 J43.P1 J43.P3 J44.P1 J44.P3 J45.1 S25.1 S26.1 S27.3 S28.1 S29.1 S30.1 TP54.P$1 TP55.P$1 U5.P$35 U5.P$36 U5.P$37 U5.P$38 U5.P$39 U5.P$40
N$1: J2.P2 J2.P4 R1.2 S1.3
N$2: J5.P2 J5.P4 R2.2 S4.3
N$3: J4.P2 J4.P4 R4.2 S2.3
N$4: J3.P2 J3.P4 R3.2 S3.1
N$5: J7.P2 J7.P4 R6.2 S6.3
N$6: J8.P2 J8.P4 R8.2
N$7: J1.P2 J1.P4 R7.2
N$8: J10.P2 J10.P4 R9.2 S7.3
N$9: J13.P2 J13.P4 R10.2 S10.3
N$10: J12.P2 J12.P4 R12.2 S8.3
N$11: J11.P2 J11.P4 R11.2 S9.1
N$12: J14.P2 J14.P4 R13.2 S11.3
N$13: J15.P2 J15.P4 R14.2 S12.3
N$14: J16.P2 J16.P4 R15.2
N$15: J17.P2 J17.P4 R16.2
N$16: J19.P2 J19.P4 R17.2 S13.3
N$17: J22.P2 J22.P4 R18.2 S16.3
N$18: J21.P2 J21.P4 R20.2 S14.3
N$19: J20.P2 J20.P4 R19.2 S15.1
N$20: J23.P2 J23.P4 R21.2 S17.3
N$21: J24.P2 J24.P4 R22.2 S18.3
N$22: J25.P2 J25.P4 R23.2
N$23: J26.P2 J26.P4 R24.2
N$24: J28.P2 J28.P4 R25.2 S19.3
N$25: J31.P2 J31.P4 R26.2 S22.3
N$26: J30.P2 J30.P4 R28.2 S20.3
N$27: J29.P2 J29.P4 R27.2 S21.1
N$28: J32.P2 J32.P4 R29.2 S23.3
N$29: J33.P2 J33.P4 R30.2 S24.3
N$30: J34.P2 J34.P4 R31.2
N$31: J35.P2 J35.P4 R32.2
N$32: J37.P2 J37.P4 R33.2 S25.3
N$33: J40.P2 J40.P4 R34.2 S28.3
N$34: J39.P2 J39.P4 R36.2 S26.3
N$35: J38.P2 J38.P4 R35.2 S27.1
N$36: J41.P2 J41.P4 R37.2 S29.3
N$37: J42.P2 J42.P4 R38.2 S30.3
N$38: J43.P2 J43.P4 R39.2
N$39: J44.P2 J44.P4 R40.2
N$80: J6.P2 J6.P4 R5.2 S5.3
SCL: J9.4 TP5.P$1 U2.P$33
SCL1: J18.4 TP18.P$1 U1.P$33
SCL2: J27.4 TP31.P$1 U3.P$33
SCL3: J36.4 TP44.P$1 U4.P$33
SCL4: J45.4 TP57.P$1 U5.P$33
SDA: J9.3 TP4.P$1 U2.P$34
SDA1: J18.3 TP17.P$1 U1.P$34
SDA2: J27.3 TP30.P$1 U3.P$34
SDA3: J36.3 TP43.P$1 U4.P$34
SDA4: J45.3 TP56.P$1 U5.P$34

## Tracks (layer width: path | path; a pad name or v marks a point on that pad's centre or on a via)
3.3V  (via drill 0.51)
  Top 0.508: U2.P$32 97.66,22.1 | 97.66,22.1 97.66,20.19 104.65,13.21 v132.59,13.21 | U2.P$27 91.31,22.73 91.95,22.1 92.58,22.1 | 92.58,22.1 v93.85,22.1 | v93.85,22.1 95.12,22.1 | 95.12,22.1 96.39,22.1 | 96.39,22.1 97.66,22.1 | U2.P$28 92.58,22.1 | U2.P$29 v93.85,22.1 | U2.P$30 95.12,22.1 | U2.P$31 96.39,22.1
  Bottom 0.254: v93.85,22.1 93.85,24 88.14,29.72 TP1.P$1
  Bottom 0.508: v132.59,13.21 132.85,13.47 J9.2
3.3V1  (via drill 0.51)
  Top 0.508: U1.P$32 97.66,73.41 | 97.66,73.41 97.66,71.5 104.65,64.52 v132.59,64.52 | U1.P$27 91.31,74.04 91.95,73.41 92.58,73.41 | 92.58,73.41 v93.85,73.41 | v93.85,73.41 95.12,73.41 | 95.12,73.41 96.39,73.41 | 96.39,73.41 97.66,73.41 | U1.P$28 92.58,73.41 | U1.P$29 v93.85,73.41 | U1.P$30 95.12,73.41 | U1.P$31 96.39,73.41
  Bottom 0.254: v93.85,73.41 93.85,75.31 88.14,81.03 TP14.P$1
  Bottom 0.508: v132.59,64.52 132.85,64.78 J18.2
3.3V2  (via drill 0.51)
  Top 0.508: U3.P$32 97.66,124.71 | 97.66,124.71 97.66,122.81 104.65,115.82 v132.59,115.82 | U3.P$27 91.31,125.35 91.95,124.71 92.58,124.71 | 92.58,124.71 v93.85,124.71 | v93.85,124.71 95.12,124.71 | 95.12,124.71 96.39,124.71 | 96.39,124.71 97.66,124.71 | U3.P$28 92.58,124.71 | U3.P$29 v93.85,124.71 | U3.P$30 95.12,124.71 | U3.P$31 96.39,124.71
  Bottom 0.254: v93.85,124.71 93.85,126.62 88.14,132.33 TP27.P$1
  Bottom 0.508: v132.59,115.82 132.85,116.09 J27.2
3.3V3  (via drill 0.51)
  Top 0.508: U4.P$32 97.66,176.02 | 97.66,176.02 97.66,174.12 104.65,167.13 v132.59,167.13 | U4.P$27 91.31,176.66 91.95,176.02 92.58,176.02 | 92.58,176.02 v93.85,176.02 | v93.85,176.02 95.12,176.02 | 95.12,176.02 96.39,176.02 | 96.39,176.02 97.66,176.02 | U4.P$28 92.58,176.02 | U4.P$29 v93.85,176.02 | U4.P$30 95.12,176.02 | U4.P$31 96.39,176.02
  Bottom 0.254: v93.85,176.02 93.85,177.93 88.14,183.64 TP40.P$1
  Bottom 0.508: v132.59,167.13 132.85,167.39 J36.2
3.3V4  (via drill 0.51)
  Top 0.508: U5.P$32 97.66,227.33 | 97.66,227.33 97.66,225.43 104.65,218.44 v132.59,218.44 | U5.P$27 91.31,227.97 91.95,227.33 92.58,227.33 | 92.58,227.33 v93.85,227.33 | v93.85,227.33 95.12,227.33 | 95.12,227.33 96.39,227.33 | 96.39,227.33 97.66,227.33 | U5.P$28 92.58,227.33 | U5.P$29 v93.85,227.33 | U5.P$30 95.12,227.33 | U5.P$31 96.39,227.33
  Bottom 0.254: v93.85,227.33 93.85,229.24 88.14,234.95 TP53.P$1
  Bottom 0.508: v132.59,218.44 132.85,218.7 J45.2
BTN_A  (via drill 0.51)
  Top 0.254: R7.1 114.81,30.99 113.54,29.72 v67.06,29.72 65.91,28.57 U2.P$7
  Bottom 0.254: TP12.P$1 67.06,32.77 v67.06,29.72
BTN_A1  (via drill 0.51)
  Top 0.254: R15.1 114.81,82.3 113.54,81.03 v67.06,81.03 65.91,79.88 U1.P$7
  Bottom 0.254: TP25.P$1 67.06,84.07 v67.06,81.03
BTN_A2  (via drill 0.51)
  Top 0.254: R23.1 114.81,133.6 113.54,132.33 v67.06,132.33 65.91,131.19 U3.P$7
  Bottom 0.254: TP38.P$1 67.06,135.38 v67.06,132.33
BTN_A3  (via drill 0.51)
  Top 0.254: R31.1 114.81,184.91 113.54,183.64 v67.06,183.64 65.91,182.5 U4.P$7
  Bottom 0.254: TP51.P$1 67.06,186.69 v67.06,183.64
BTN_A4  (via drill 0.51)
  Top 0.254: R39.1 114.81,236.22 113.54,234.95 v67.06,234.95 65.91,233.81 U5.P$7
  Bottom 0.254: TP64.P$1 67.06,238 v67.06,234.95
BTN_B  (via drill 0.51)
  Top 0.254: R8.1 131.32,20.07 130.81,19.56 122.43,19.56 113.54,28.45 79.63,28.45 v78.61,27.43 U2.P$17
  Bottom 0.254: TP9.P$1 78.61,35.43 v78.61,27.43
BTN_B1  (via drill 0.51)
  Top 0.254: R16.1 131.32,71.37 130.81,70.87 122.43,70.87 113.54,79.76 79.63,79.76 v78.61,78.74 U1.P$17
  Bottom 0.254: TP22.P$1 78.61,86.74 v78.61,78.74
BTN_B2  (via drill 0.51)
  Top 0.254: R24.1 131.32,122.68 130.81,122.17 122.43,122.17 113.54,131.06 79.63,131.06 v78.61,130.05 U3.P$17
  Bottom 0.254: TP35.P$1 78.61,138.05 v78.61,130.05
BTN_B3  (via drill 0.51)
  Top 0.254: R32.1 131.32,173.99 130.81,173.48 122.43,173.48 113.54,182.37 79.63,182.37 v78.61,181.36 U4.P$17
  Bottom 0.254: TP48.P$1 78.61,189.36 v78.61,181.36
BTN_B4  (via drill 0.51)
  Top 0.254: R40.1 131.32,225.3 130.81,224.79 122.43,224.79 113.54,233.68 79.63,233.68 v78.61,232.66 U5.P$17
  Bottom 0.254: TP61.P$1 78.61,240.66 v78.61,232.66
BTN_DN  (via drill 0.51)
  Top 0.254: R4.1 46.86,16.89 48.77,14.99 71.76,14.99 74.8,18.03 U2.P$14 74.8,27.81 v75.44,28.45
  Bottom 0.254: v75.44,28.45 TP10.P$1
BTN_DN1  (via drill 0.51)
  Top 0.254: R12.1 46.86,68.2 48.77,66.29 71.76,66.29 74.8,69.34 U1.P$14 74.8,79.12 v75.44,79.76
  Bottom 0.254: v75.44,79.76 TP23.P$1
BTN_DN2  (via drill 0.51)
  Top 0.254: R20.1 46.86,119.51 48.77,117.6 71.76,117.6 74.8,120.65 U3.P$14 74.8,130.43 v75.44,131.06
  Bottom 0.254: v75.44,131.06 TP36.P$1
BTN_DN3  (via drill 0.51)
  Top 0.254: R28.1 46.86,170.81 48.77,168.91 71.76,168.91 74.8,171.96 U4.P$14 74.8,181.74 v75.44,182.37
  Bottom 0.254: v75.44,182.37 TP49.P$1
BTN_DN4  (via drill 0.51)
  Top 0.254: R36.1 46.86,222.12 48.77,220.22 71.76,220.22 74.8,223.27 U5.P$14 74.8,233.05 v75.44,233.68
  Bottom 0.254: v75.44,233.68 TP62.P$1
BTN_L  (via drill 0.51)
  Top 0.254: R2.1 48.77,17.02 49.78,16 67.56,16 69.72,18.16 69.72,22.1 | U2.P$10 69.72,22.1 | 72.26,22.1 72.9,22.1 73.53,22.73 U2.P$13 73.53,27.81 v72.9,28.45 | 72.26,22.1 70.99,22.1 | 70.99,22.1 69.72,22.1 | U2.P$11 70.99,22.1 | U2.P$12 72.26,22.1
  Bottom 0.254: v72.9,28.45 TP11.P$1
BTN_L1  (via drill 0.51)
  Top 0.254: R10.1 48.77,68.33 49.78,67.31 67.56,67.31 69.72,69.47 69.72,73.41 | U1.P$10 69.72,73.41 | 72.26,73.41 72.9,73.41 73.53,74.04 U1.P$13 73.53,79.12 v72.9,79.76 | 72.26,73.41 70.99,73.41 | 70.99,73.41 69.72,73.41 | U1.P$11 70.99,73.41 | U1.P$12 72.26,73.41
  Bottom 0.254: v72.9,79.76 TP24.P$1
BTN_L2  (via drill 0.51)
  Top 0.254: R18.1 48.77,119.63 49.78,118.62 67.56,118.62 69.72,120.78 69.72,124.71 | U3.P$10 69.72,124.71 | 72.26,124.71 72.9,124.71 73.53,125.35 U3.P$13 73.53,130.43 v72.9,131.06 | 72.26,124.71 70.99,124.71 | 70.99,124.71 69.72,124.71 | U3.P$11 70.99,124.71 | U3.P$12 72.26,124.71
  Bottom 0.254: v72.9,131.06 TP37.P$1
BTN_L3  (via drill 0.51)
  Top 0.254: R26.1 48.77,170.94 49.78,169.93 67.56,169.93 69.72,172.09 69.72,176.02 | U4.P$10 69.72,176.02 | 72.26,176.02 72.9,176.02 73.53,176.66 U4.P$13 73.53,181.74 v72.9,182.37 | 72.26,176.02 70.99,176.02 | 70.99,176.02 69.72,176.02 | U4.P$11 70.99,176.02 | U4.P$12 72.26,176.02
  Bottom 0.254: v72.9,182.37 TP50.P$1
BTN_L4  (via drill 0.51)
  Top 0.254: R34.1 48.77,222.25 49.78,221.23 67.56,221.23 69.72,223.39 69.72,227.33 | U5.P$10 69.72,227.33 | 72.26,227.33 72.9,227.33 73.53,227.97 U5.P$13 73.53,233.05 v72.9,233.68 | 72.26,227.33 70.99,227.33 | 70.99,227.33 69.72,227.33 | U5.P$11 70.99,227.33 | U5.P$12 72.26,227.33
  Bottom 0.254: v72.9,233.68 TP63.P$1
BTN_P1  (via drill 0.51)
  Top 0.254: R14.1 135.13,70.87 133.98,69.72 121.92,69.72 112.9,78.74 90.55,78.74 90.04,78.23 U1.P$26 v90.04,73.53
  Bottom 0.254: v90.04,73.53 85.6,77.98 TP19.P$1
BTN_P2  (via drill 0.51)
  Top 0.254: U1.P$18 v79.88,78.61 80.52,79.25 113.28,79.25 122.17,70.36 132.72,70.36 133.22,70.87 R13.1
  Bottom 0.254: TP21.P$1 80.52,79.25 v79.88,78.61
BTN_P3  (via drill 0.51)
  Top 0.254: R22.1 135.13,122.17 133.98,121.03 121.92,121.03 112.9,130.05 90.55,130.05 90.04,129.54 U3.P$26 v90.04,124.84
  Bottom 0.254: v90.04,124.84 85.6,129.29 TP32.P$1
BTN_P4  (via drill 0.51)
  Top 0.254: U3.P$18 v79.88,129.92 80.52,130.56 113.28,130.56 122.17,121.67 132.72,121.67 133.22,122.17 R21.1
  Bottom 0.254: TP34.P$1 80.52,130.56 v79.88,129.92
BTN_P5  (via drill 0.51)
  Top 0.254: R30.1 135.13,173.48 133.98,172.34 121.92,172.34 112.9,181.36 90.55,181.36 90.04,180.85 U4.P$26 v90.04,176.15
  Bottom 0.254: v90.04,176.15 85.6,180.59 TP45.P$1
BTN_P6  (via drill 0.51)
  Top 0.254: U4.P$18 v79.88,181.23 80.52,181.86 113.28,181.86 122.17,172.97 132.72,172.97 133.22,173.48 R29.1
  Bottom 0.254: TP47.P$1 80.52,181.86 v79.88,181.23
BTN_P7  (via drill 0.51)
  Top 0.254: R38.1 135.13,224.79 133.98,223.65 121.92,223.65 112.9,232.66 90.55,232.66 90.04,232.16 U5.P$26 v90.04,227.46
  Bottom 0.254: v90.04,227.46 85.6,231.9 TP58.P$1
BTN_P8  (via drill 0.51)
  Top 0.254: U5.P$18 v79.88,232.54 80.52,233.17 113.28,233.17 122.17,224.28 132.72,224.28 133.22,224.79 R37.1
  Bottom 0.254: TP60.P$1 80.52,233.17 v79.88,232.54
BTN_P12  (via drill 0.51)
  Top 0.254: U2.P$18 v79.88,27.3 80.52,27.94 113.28,27.94 122.17,19.05 132.72,19.05 133.22,19.56 R5.1
  Bottom 0.254: TP8.P$1 80.52,27.94 v79.88,27.3
BTN_P16  (via drill 0.51)
  Top 0.254: R6.1 135.13,19.56 133.98,18.41 121.92,18.41 112.9,27.43 90.55,27.43 90.04,26.92 U2.P$26 v90.04,22.23
  Bottom 0.254: v90.04,22.23 85.6,26.67 TP6.P$1
BTN_R  (via drill 0.51)
  Top 0.254: R3.1 44.96,16.89 48.01,13.84 77.85,13.84 82.04,18.03 82.04,22.1 | U2.P$20 82.42,22.1 | U2.P$19 81.15,22.73 81.79,22.1 82.04,22.1 | 82.04,22.1 82.42,22.1 | U2.P$22 84.96,22.73 84.33,22.1 83.69,22.1 | 83.69,22.1 82.42,22.1 | 83.69,22.1 U2.P$21 v83.69,26.92
  Bottom 0.254: v83.69,26.92 83.06,27.56 TP7.P$1
BTN_R1  (via drill 0.51)
  Top 0.254: R11.1 44.96,68.2 48.01,65.15 77.85,65.15 82.04,69.34 82.04,73.41 | U1.P$20 82.42,73.41 | U1.P$19 81.15,74.04 81.79,73.41 82.04,73.41 | 82.04,73.41 82.42,73.41 | U1.P$22 84.96,74.04 84.33,73.41 83.69,73.41 | 83.69,73.41 82.42,73.41 | 83.69,73.41 U1.P$21 v83.69,78.23
  Bottom 0.254: v83.69,78.23 83.06,78.87 TP20.P$1
BTN_R2  (via drill 0.51)
  Top 0.254: R19.1 44.96,119.51 48.01,116.46 77.85,116.46 82.04,120.65 82.04,124.71 | U3.P$20 82.42,124.71 | U3.P$19 81.15,125.35 81.79,124.71 82.04,124.71 | 82.04,124.71 82.42,124.71 | U3.P$22 84.96,125.35 84.33,124.71 83.69,124.71 | 83.69,124.71 82.42,124.71 | 83.69,124.71 U3.P$21 v83.69,129.54
  Bottom 0.254: v83.69,129.54 83.06,130.17 TP33.P$1
BTN_R3  (via drill 0.51)
  Top 0.254: R27.1 44.96,170.81 48.01,167.77 77.85,167.77 82.04,171.96 82.04,176.02 | U4.P$20 82.42,176.02 | U4.P$19 81.15,176.66 81.79,176.02 82.04,176.02 | 82.04,176.02 82.42,176.02 | U4.P$22 84.96,176.66 84.33,176.02 83.69,176.02 | 83.69,176.02 82.42,176.02 | 83.69,176.02 U4.P$21 v83.69,180.85
  Bottom 0.254: v83.69,180.85 83.06,181.48 TP46.P$1
BTN_R4  (via drill 0.51)
  Top 0.254: R35.1 44.96,222.12 48.01,219.08 77.85,219.08 82.04,223.27 82.04,227.33 | U5.P$20 82.42,227.33 | U5.P$19 81.15,227.97 81.79,227.33 82.04,227.33 | 82.04,227.33 82.42,227.33 | U5.P$22 84.96,227.97 84.33,227.33 83.69,227.33 | 83.69,227.33 82.42,227.33 | 83.69,227.33 U5.P$21 v83.69,232.16
  Bottom 0.254: v83.69,232.16 83.06,232.79 TP59.P$1
BTN_UP  (via drill 0.51)
  Top 0.254: R1.1 50.67,17.65 51.31,17.02 58.42,17.02 59.56,18.16 59.56,22.1 | 59.56,22.1 U2.P$2 | 62.1,22.1 62.74,22.1 63.37,22.73 U2.P$5 v63.37,27.3 | 62.1,22.1 60.83,22.1 | 60.83,22.1 59.56,22.1 | U2.P$3 60.83,22.1 | U2.P$4 62.1,22.1
  Bottom 0.254: v63.37,27.3 63.37,31.62 TP13.P$1
BTN_UP1  (via drill 0.51)
  Top 0.254: R9.1 50.67,68.96 51.31,68.33 58.42,68.33 59.56,69.47 59.56,73.41 | 59.56,73.41 U1.P$2 | 62.1,73.41 62.74,73.41 63.37,74.04 U1.P$5 v63.37,78.61 | 62.1,73.41 60.83,73.41 | 60.83,73.41 59.56,73.41 | U1.P$3 60.83,73.41 | U1.P$4 62.1,73.41
  Bottom 0.254: v63.37,78.61 63.37,82.93 TP26.P$1
BTN_UP2  (via drill 0.51)
  Top 0.254: R17.1 50.67,120.27 51.31,119.63 58.42,119.63 59.56,120.78 59.56,124.71 | 59.56,124.71 U3.P$2 | 62.1,124.71 62.74,124.71 63.37,125.35 U3.P$5 v63.37,129.92 | 62.1,124.71 60.83,124.71 | 60.83,124.71 59.56,124.71 | U3.P$3 60.83,124.71 | U3.P$4 62.1,124.71
  Bottom 0.254: v63.37,129.92 63.37,134.24 TP39.P$1
BTN_UP3  (via drill 0.51)
  Top 0.254: R25.1 50.67,171.58 51.31,170.94 58.42,170.94 59.56,172.09 59.56,176.02 | 59.56,176.02 U4.P$2 | 62.1,176.02 62.74,176.02 63.37,176.66 U4.P$5 v63.37,181.23 | 62.1,176.02 60.83,176.02 | 60.83,176.02 59.56,176.02 | U4.P$3 60.83,176.02 | U4.P$4 62.1,176.02
  Bottom 0.254: v63.37,181.23 63.37,185.55 TP52.P$1
BTN_UP4  (via drill 0.51)
  Top 0.254: R33.1 50.67,222.88 51.31,222.25 58.42,222.25 59.56,223.39 59.56,227.33 | 59.56,227.33 U5.P$2 | 62.1,227.33 62.74,227.33 63.37,227.97 U5.P$5 v63.37,232.54 | 62.1,227.33 60.83,227.33 | 60.83,227.33 59.56,227.33 | U5.P$3 60.83,227.33 | U5.P$4 62.1,227.33
  Bottom 0.254: v63.37,232.54 63.37,236.86 TP65.P$1
GND  (via drill 0.51)
  Bottom 0.254: J2.P3 J2.P1 | J3.P3 J3.P1 | J5.P3 J5.P1 | J4.P1 J4.P3 | J6.P1 J6.P3 | J7.P1 J7.P3
  other vias: 9.4,9.4 19.56,8.13 32.26,8.13 44.96,8.13 57.66,8.13 70.36,8.13 83.06,8.13 95.76,8.13 108.46,8.13 121.16,8.13 133.86,8.13 146.56,8.13 156.72,9.4 157.35,55.12 146.56,56.39 133.86,56.39 121.16,56.39 108.46,56.39 95.76,56.39 83.06,56.39 70.36,56.39 57.66,56.39 45.59,56.39 32.26,56.39 19.56,56.39 8.76,55.12 8.13,19.56 8.13,32.26 8.13,44.96 157.99,19.56 157.99,32.26 157.99,44.96 107.19,22.1 104.65,22.1 32.89,45.59 27.18,27.18 41.78,36.07 53.85,32.26 142.11,22.73 146.56,30.99 117.98,48.77 137.67,40.51 127.51,34.8 121.16,46.86 22.73,33.53 25.91,33.53 17.65,50.04 137.67,30.99 102.11,22.1 66.55,19.56 72.9,19.56
  pour Top (isolate 0.305, rank 5): 6.86,57.66 157.46,57.66 arc-90 159.26,55.86 159.26,6.86 6.86,6.86
  pour Bottom (isolate 0.305, rank 5): 159.26,57.66 8.65,57.66 arc90 6.86,55.86 6.86,6.86 159.26,6.86
GND1  (via drill 0.51)
  Bottom 0.254: J10.P3 J10.P1 | J11.P3 J11.P1 | J13.P3 J13.P1 | J12.P1 J12.P3 | J14.P1 J14.P3 | J15.P1 J15.P3
  other vias: 9.4,60.71 19.56,59.44 32.26,59.44 44.96,59.44 57.66,59.44 70.36,59.44 83.06,59.44 95.76,59.44 108.46,59.44 121.16,59.44 133.86,59.44 146.56,59.44 156.72,60.71 157.35,106.43 146.56,107.7 133.86,107.7 121.16,107.7 108.46,107.7 95.76,107.7 83.06,107.7 70.36,107.7 57.66,107.7 45.59,107.7 32.26,107.7 19.56,107.7 8.76,106.43 8.13,70.87 8.13,83.57 8.13,96.27 157.99,70.87 157.99,83.57 157.99,96.27 107.19,73.41 104.65,73.41 32.89,96.9 27.18,78.49 41.78,87.38 53.85,83.57 142.11,74.04 146.56,82.3 117.98,100.08 137.67,91.82 127.51,86.11 121.16,98.17 22.73,84.84 25.91,84.84 17.65,101.35 137.67,82.3 102.11,73.41 66.55,70.87 72.9,70.87
  pour Top (isolate 0.305, rank 5): 6.86,108.97 157.46,108.97 arc-90 159.26,107.17 159.26,58.17 6.86,58.17
  pour Bottom (isolate 0.305, rank 5): 159.26,108.97 8.65,108.97 arc90 6.86,107.17 6.86,58.17 159.26,58.17
GND2  (via drill 0.51)
  Bottom 0.254: J19.P3 J19.P1 | J20.P3 J20.P1 | J22.P3 J22.P1 | J21.P1 J21.P3 | J23.P1 J23.P3 | J24.P1 J24.P3
  other vias: 9.4,112.01 19.56,110.74 32.26,110.74 44.96,110.74 57.66,110.74 70.36,110.74 83.06,110.74 95.76,110.74 108.46,110.74 121.16,110.74 133.86,110.74 146.56,110.74 156.72,112.01 157.35,157.73 146.56,159 133.86,159 121.16,159 108.46,159 95.76,159 83.06,159 70.36,159 57.66,159 45.59,159 32.26,159 19.56,159 8.76,157.73 8.13,122.17 8.13,134.87 8.13,147.57 157.99,122.17 157.99,134.87 157.99,147.57 107.19,124.71 104.65,124.71 32.89,148.21 27.18,129.79 41.78,138.68 53.85,134.87 142.11,125.35 146.56,133.6 117.98,151.38 137.67,143.13 127.51,137.41 121.16,149.48 22.73,136.14 25.91,136.14 17.65,152.65 137.67,133.6 102.11,124.71 66.55,122.17 72.9,122.17
  pour Top (isolate 0.305, rank 5): 6.86,160.27 157.46,160.27 arc-90 159.26,158.48 159.26,109.47 6.86,109.47
  pour Bottom (isolate 0.305, rank 5): 159.26,160.27 8.65,160.27 arc90 6.86,158.48 6.86,109.47 159.26,109.47
GND3  (via drill 0.51)
  Bottom 0.254: J28.P3 J28.P1 | J29.P3 J29.P1 | J31.P3 J31.P1 | J30.P1 J30.P3 | J32.P1 J32.P3 | J33.P1 J33.P3
  other vias: 9.4,163.32 19.56,162.05 32.26,162.05 44.96,162.05 57.66,162.05 70.36,162.05 83.06,162.05 95.76,162.05 108.46,162.05 121.16,162.05 133.86,162.05 146.56,162.05 156.72,163.32 157.35,209.04 146.56,210.31 133.86,210.31 121.16,210.31 108.46,210.31 95.76,210.31 83.06,210.31 70.36,210.31 57.66,210.31 45.59,210.31 32.26,210.31 19.56,210.31 8.76,209.04 8.13,173.48 8.13,186.18 8.13,198.88 157.99,173.48 157.99,186.18 157.99,198.88 107.19,176.02 104.65,176.02 32.89,199.52 27.18,181.1 41.78,189.99 53.85,186.18 142.11,176.66 146.56,184.91 117.98,202.69 137.67,194.44 127.51,188.72 121.16,200.79 22.73,187.45 25.91,187.45 17.65,203.96 137.67,184.91 102.11,176.02 66.55,173.48 72.9,173.48
  pour Top (isolate 0.305, rank 5): 6.86,211.58 157.46,211.58 arc-90 159.26,209.79 159.26,160.78 6.86,160.78
  pour Bottom (isolate 0.305, rank 5): 159.26,211.58 8.65,211.58 arc90 6.86,209.79 6.86,160.78 159.26,160.78
GND4  (via drill 0.51)
  Bottom 0.254: J37.P3 J37.P1 | J38.P3 J38.P1 | J40.P3 J40.P1 | J39.P1 J39.P3 | J41.P1 J41.P3 | J42.P1 J42.P3
  other vias: 9.4,214.63 19.56,213.36 32.26,213.36 44.96,213.36 57.66,213.36 70.36,213.36 83.06,213.36 95.76,213.36 108.46,213.36 121.16,213.36 133.86,213.36 146.56,213.36 156.72,214.63 157.35,260.35 146.56,261.62 133.86,261.62 121.16,261.62 108.46,261.62 95.76,261.62 83.06,261.62 70.36,261.62 57.66,261.62 45.59,261.62 32.26,261.62 19.56,261.62 8.76,260.35 8.13,224.79 8.13,237.49 8.13,250.19 157.99,224.79 157.99,237.49 157.99,250.19 107.19,227.33 104.65,227.33 32.89,250.83 27.18,232.41 41.78,241.3 53.85,237.49 142.11,227.97 146.56,236.22 117.98,254 137.67,245.75 127.51,240.03 121.16,252.09 22.73,238.76 25.91,238.76 17.65,255.27 137.67,236.22 102.11,227.33 66.55,224.79 72.9,224.79
  pour Top (isolate 0.305, rank 5): 6.86,262.89 157.46,262.89 arc-90 159.26,261.09 159.26,212.09 6.86,212.09
  pour Bottom (isolate 0.305, rank 5): 159.26,262.89 8.65,262.89 arc90 6.86,261.09 6.86,212.09 159.26,212.09
N$1  (via drill 0.51)
  Top 0.254: R1.2 50.67,27.18 49.4,28.45 v49.4,31.62 | S1.3 29.04,41.19 31.62,38.61 v31.62,31.62
  Bottom 0.254: J2.P4 J2.P2 15.21,33.43 17.02,31.62 v31.62,31.62 v49.4,31.62
N$2  (via drill 0.51)
  Top 0.254: R2.2 48.77,30.99 48.13,31.62 v48.13,32.89 | S4.3 24.14,34.76 v24.1,34.8
  Bottom 0.254: J5.P4 J5.P2 v24.1,34.8 24.1,32.8 24.64,32.26 30.35,32.26 30.99,32.89 32.26,32.89 32.89,32.26 47.5,32.26 v48.13,32.89
N$3  (via drill 0.51)
  Top 0.254: R4.2 v46.86,27.18 46.86,34.8 50.67,38.61 v53.85,38.61 | S2.3 39.87,25.9 41.15,27.18 v42.42,27.18
  Bottom 0.254: J4.P4 J4.P2 54.58,39.34 v53.85,38.61 | v42.42,27.18 v46.86,27.18
N$4  (via drill 0.51)
  Top 0.254: S3.1 44.92,34.76 v44.96,34.8 R3.2
  Bottom 0.254: J3.P4 J3.P2 45.69,35.53 v44.96,34.8
N$5  (via drill 0.51)
  Top 0.254: R6.2 135.13,27.18 136.4,28.45 145.29,28.45 | 145.29,28.45 145.29,25.32 S6.3 | v151.64,37.34 151.64,29.72 150.37,28.45 145.29,28.45
  Bottom 0.254: J7.P4 J7.P2 154.91,40.61 v151.64,37.34
N$6  (via drill 0.51)
  Top 0.254: R8.2 131.32,26.42 v129.16,28.57
  Bottom 0.254: J8.P4 J8.P2 124.43,29.62 125.48,28.57 v129.16,28.57
N$7  (via drill 0.51)
  Top 0.254: R7.2 114.81,37.34 v115.44,37.97
  Bottom 0.254: J1.P4 J1.P2 115.54,38.07 v115.44,37.97
N$8  (via drill 0.51)
  Top 0.254: R9.2 50.67,78.49 49.4,79.76 v49.4,82.93 | S7.3 29.04,92.5 31.62,89.92 v31.62,82.93
  Bottom 0.254: J10.P4 J10.P2 15.21,84.74 17.02,82.93 v31.62,82.93 v49.4,82.93
N$9  (via drill 0.51)
  Top 0.254: R10.2 48.77,82.3 48.13,82.93 v48.13,84.2 | S10.3 24.14,86.07 v24.1,86.11
  Bottom 0.254: J13.P4 J13.P2 v24.1,86.11 24.1,84.11 24.64,83.57 30.35,83.57 30.99,84.2 32.26,84.2 32.89,83.57 47.5,83.57 v48.13,84.2
N$10  (via drill 0.51)
  Top 0.254: R12.2 v46.86,78.49 46.86,86.11 50.67,89.92 v53.85,89.92 | S8.3 39.87,77.21 41.15,78.49 v42.42,78.49
  Bottom 0.254: J12.P4 J12.P2 54.58,90.65 v53.85,89.92 | v42.42,78.49 v46.86,78.49
N$11  (via drill 0.51)
  Top 0.254: S9.1 44.92,86.07 v44.96,86.11 R11.2
  Bottom 0.254: J11.P4 J11.P2 45.69,86.84 v44.96,86.11
N$12  (via drill 0.51)
  Top 0.254: v145.29,87.38 135.76,87.38 133.22,84.84 133.22,82.3 | 133.22,82.3 R13.2 | S11.3 126.2,80.99 127.51,82.3 133.22,82.3
  Bottom 0.254: J14.P4 J14.P2 146.02,88.11 v145.29,87.38
N$13  (via drill 0.51)
  Top 0.254: R14.2 135.13,78.49 136.4,79.76 145.29,79.76 | 145.29,79.76 145.29,76.63 S12.3 | v151.64,88.65 151.64,81.03 150.37,79.76 145.29,79.76
  Bottom 0.254: J15.P4 J15.P2 154.91,91.92 v151.64,88.65
N$14  (via drill 0.51)
  Top 0.254: R15.2 114.81,88.65 v115.44,89.28
  Bottom 0.254: J16.P4 J16.P2 115.54,89.38 v115.44,89.28
N$15  (via drill 0.51)
  Top 0.254: R16.2 131.32,77.72 v129.16,79.88
  Bottom 0.254: J17.P4 J17.P2 124.43,80.93 125.48,79.88 v129.16,79.88
N$16  (via drill 0.51)
  Top 0.254: R17.2 50.67,129.79 49.4,131.06 v49.4,134.24 | S13.3 29.04,143.8 31.62,141.22 v31.62,134.24
  Bottom 0.254: J19.P4 J19.P2 15.21,136.05 17.02,134.24 v31.62,134.24 v49.4,134.24
N$17  (via drill 0.51)
  Top 0.254: R18.2 48.77,133.6 48.13,134.24 v48.13,135.51 | S16.3 24.14,137.37 v24.1,137.41
  Bottom 0.254: J22.P4 J22.P2 v24.1,137.41 24.1,135.41 24.64,134.87 30.35,134.87 30.99,135.51 32.26,135.51 32.89,134.87 47.5,134.87 v48.13,135.51
N$18  (via drill 0.51)
  Top 0.254: R20.2 v46.86,129.79 46.86,137.41 50.67,141.22 v53.85,141.22 | S14.3 39.87,128.51 41.15,129.79 v42.42,129.79
  Bottom 0.254: J21.P4 J21.P2 54.58,141.95 v53.85,141.22 | v42.42,129.79 v46.86,129.79
N$19  (via drill 0.51)
  Top 0.254: S15.1 44.92,137.37 v44.96,137.41 R19.2
  Bottom 0.254: J20.P4 J20.P2 45.69,138.14 v44.96,137.41
N$20  (via drill 0.51)
  Top 0.254: v145.29,138.68 135.76,138.68 133.22,136.14 133.22,133.6 | 133.22,133.6 R21.2 | S17.3 126.2,132.29 127.51,133.6 133.22,133.6
  Bottom 0.254: J23.P4 J23.P2 146.02,139.41 v145.29,138.68
N$21  (via drill 0.51)
  Top 0.254: R22.2 135.13,129.79 136.4,131.06 145.29,131.06 | 145.29,131.06 145.29,127.94 S18.3 | v151.64,139.95 151.64,132.33 150.37,131.06 145.29,131.06
  Bottom 0.254: J24.P4 J24.P2 154.91,143.22 v151.64,139.95
N$22  (via drill 0.51)
  Top 0.254: R23.2 114.81,139.95 v115.44,140.59
  Bottom 0.254: J25.P4 J25.P2 115.54,140.68 v115.44,140.59
N$23  (via drill 0.51)
  Top 0.254: R24.2 131.32,129.03 v129.16,131.19
  Bottom 0.254: J26.P4 J26.P2 124.43,132.24 125.48,131.19 v129.16,131.19
N$24  (via drill 0.51)
  Top 0.254: R25.2 50.67,181.1 49.4,182.37 v49.4,185.55 | S19.3 29.04,195.11 31.62,192.53 v31.62,185.55
  Bottom 0.254: J28.P4 J28.P2 15.21,187.36 17.02,185.55 v31.62,185.55 v49.4,185.55
N$25  (via drill 0.51)
  Top 0.254: R26.2 48.77,184.91 48.13,185.55 v48.13,186.82 | S22.3 24.14,188.68 v24.1,188.72
  Bottom 0.254: J31.P4 J31.P2 v24.1,188.72 24.1,186.72 24.64,186.18 30.35,186.18 30.99,186.82 32.26,186.82 32.89,186.18 47.5,186.18 v48.13,186.82
N$26  (via drill 0.51)
  Top 0.254: R28.2 v46.86,181.1 46.86,188.72 50.67,192.53 v53.85,192.53 | S20.3 39.87,179.82 41.15,181.1 v42.42,181.1
  Bottom 0.254: J30.P4 J30.P2 54.58,193.26 v53.85,192.53 | v42.42,181.1 v46.86,181.1
N$27  (via drill 0.51)
  Top 0.254: S21.1 44.92,188.68 v44.96,188.72 R27.2
  Bottom 0.254: J29.P4 J29.P2 45.69,189.45 v44.96,188.72
N$28  (via drill 0.51)
  Top 0.254: v145.29,189.99 135.76,189.99 133.22,187.45 133.22,184.91 | 133.22,184.91 R29.2 | S23.3 126.2,183.6 127.51,184.91 133.22,184.91
  Bottom 0.254: J32.P4 J32.P2 146.02,190.72 v145.29,189.99
N$29  (via drill 0.51)
  Top 0.254: R30.2 135.13,181.1 136.4,182.37 145.29,182.37 | 145.29,182.37 145.29,179.25 S24.3 | v151.64,191.26 151.64,183.64 150.37,182.37 145.29,182.37
  Bottom 0.254: J33.P4 J33.P2 154.91,194.53 v151.64,191.26
N$30  (via drill 0.51)
  Top 0.254: R31.2 114.81,191.26 v115.44,191.9
  Bottom 0.254: J34.P4 J34.P2 115.54,191.99 v115.44,191.9
N$31  (via drill 0.51)
  Top 0.254: R32.2 131.32,180.34 v129.16,182.5
  Bottom 0.254: J35.P4 J35.P2 124.43,183.55 125.48,182.5 v129.16,182.5
N$32  (via drill 0.51)
  Top 0.254: R33.2 50.67,232.41 49.4,233.68 v49.4,236.86 | S25.3 29.04,246.42 31.62,243.84 v31.62,236.86
  Bottom 0.254: J37.P4 J37.P2 15.21,238.66 17.02,236.86 v31.62,236.86 v49.4,236.86
N$33  (via drill 0.51)
  Top 0.254: R34.2 48.77,236.22 48.13,236.86 v48.13,238.12 | S28.3 24.14,239.99 v24.1,240.03
  Bottom 0.254: J40.P4 J40.P2 v24.1,240.03 24.1,238.03 24.64,237.49 30.35,237.49 30.99,238.12 32.26,238.12 32.89,237.49 47.5,237.49 v48.13,238.12
N$34  (via drill 0.51)
  Top 0.254: R36.2 v46.86,232.41 46.86,240.03 50.67,243.84 v53.85,243.84 | S26.3 39.87,231.13 41.15,232.41 v42.42,232.41
  Bottom 0.254: J39.P4 J39.P2 54.58,244.57 v53.85,243.84 | v42.42,232.41 v46.86,232.41
N$35  (via drill 0.51)
  Top 0.254: S27.1 44.92,239.99 v44.96,240.03 R35.2
  Bottom 0.254: J38.P4 J38.P2 45.69,240.76 v44.96,240.03
N$36  (via drill 0.51)
  Top 0.254: v145.29,241.3 135.76,241.3 133.22,238.76 133.22,236.22 | 133.22,236.22 R37.2 | S29.3 126.2,234.91 127.51,236.22 133.22,236.22
  Bottom 0.254: J41.P4 J41.P2 146.02,242.03 v145.29,241.3
N$37  (via drill 0.51)
  Top 0.254: R38.2 135.13,232.41 136.4,233.68 145.29,233.68 | 145.29,233.68 145.29,230.56 S30.3 | v151.64,242.57 151.64,234.95 150.37,233.68 145.29,233.68
  Bottom 0.254: J42.P4 J42.P2 154.91,245.84 v151.64,242.57
N$38  (via drill 0.51)
  Top 0.254: R39.2 114.81,242.57 v115.44,243.21
  Bottom 0.254: J43.P4 J43.P2 115.54,243.3 v115.44,243.21
N$39  (via drill 0.51)
  Top 0.254: R40.2 131.32,231.65 v129.16,233.81
  Bottom 0.254: J44.P4 J44.P2 124.43,234.86 125.48,233.81 v129.16,233.81
N$80  (via drill 0.51)
  Top 0.254: v145.29,36.07 135.76,36.07 133.22,33.53 133.22,30.99 | 133.22,30.99 R5.2 | S5.3 126.2,29.68 127.51,30.99 133.22,30.99
  Bottom 0.254: J6.P4 J6.P2 146.02,36.8 v145.29,36.07
SCL  (via drill 0.51)
  Top 0.254: U2.P$33 v98.93,22.48 98.93,20.57 105.03,14.48 v137.67,14.48
  Bottom 0.254: v137.67,14.48 134.85,17.3 J9.4 | TP5.P$1 90.68,30.73 v98.93,22.48
SCL1  (via drill 0.51)
  Top 0.254: U1.P$33 v98.93,73.79 98.93,71.88 105.03,65.79 v137.67,65.79
  Bottom 0.254: v137.67,65.79 134.85,68.6 J18.4 | TP18.P$1 90.68,82.04 v98.93,73.79
SCL2  (via drill 0.51)
  Top 0.254: U3.P$33 v98.93,125.09 98.93,123.19 105.03,117.09 v137.67,117.09
  Bottom 0.254: v137.67,117.09 134.85,119.91 J27.4 | TP31.P$1 90.68,133.35 v98.93,125.09
SCL3  (via drill 0.51)
  Top 0.254: U4.P$33 v98.93,176.4 98.93,174.5 105.03,168.4 v137.67,168.4
  Bottom 0.254: v137.67,168.4 134.85,171.22 J36.4 | TP44.P$1 90.68,184.66 v98.93,176.4
SCL4  (via drill 0.51)
  Top 0.254: U5.P$33 v98.93,227.71 98.93,225.81 105.03,219.71 v137.67,219.71
  Bottom 0.254: v137.67,219.71 134.85,222.53 J45.4 | TP57.P$1 90.68,235.97 v98.93,227.71
SDA  (via drill 0.51)
  Top 0.254: v134.49,15.75 105.41,15.75 v100.2,20.95 U2.P$34
  Bottom 0.254: J9.3 133.85,16.39 v134.49,15.75 | TP4.P$1 93.22,31.37 100.2,24.38 v100.2,20.95
SDA1  (via drill 0.51)
  Top 0.254: v134.49,67.06 105.41,67.06 v100.2,72.26 U1.P$34
  Bottom 0.254: J18.3 133.85,67.7 v134.49,67.06 | TP17.P$1 93.22,82.68 100.2,75.69 v100.2,72.26
SDA2  (via drill 0.51)
  Top 0.254: v134.49,118.36 105.41,118.36 v100.2,123.57 U3.P$34
  Bottom 0.254: J27.3 133.85,119.01 v134.49,118.36 | TP30.P$1 93.22,133.98 100.2,127 v100.2,123.57
SDA3  (via drill 0.51)
  Top 0.254: v134.49,169.67 105.41,169.67 v100.2,174.88 U4.P$34
  Bottom 0.254: J36.3 133.85,170.31 v134.49,169.67 | TP43.P$1 93.22,185.29 100.2,178.31 v100.2,174.88
SDA4  (via drill 0.51)
  Top 0.254: v134.49,220.98 105.41,220.98 v100.2,226.19 U5.P$34
  Bottom 0.254: J45.3 133.85,221.62 v134.49,220.98 | TP56.P$1 93.22,236.6 100.2,229.62 v100.2,226.19

## Text on the board
Bottom: v21 | v21 | v21 | v21 | v21
Dimension: ROUTE / OUT | ROUTE / OUT | ROUTE / OUT | ROUTE / OUT | ROUTE / OUT
tPlace: P0 | P12 | P16 | P1 | P2 | P8 | P0 | P12 | P16 | P1 | P2 | P8 | P0 | P12 | P16 | P1 | P2 | P8 | P0 | P12 | P16 | P1 | P2 | P8 | P0 | P12 | P16 | P1 | P2 | P8
bPlace: P0 | P1 | P2 | P8 | A | B | P12 | P16 | sparkfun.com/microbit | P0 | P1 | P2 | P8 | A | B | P12 | P16 | sparkfun.com/microbit | P0 | P1 | P2 | P8 | A | B | P12 | P16 | sparkfun.com/microbit | P0 | P1 | P2 | P8 | A | B | P12 | P16 | sparkfun.com/microbit | P0 | P1 | P2 | P8 | A | B | P12 | P16 | sparkfun.com/microbit
Milling: v-score | v-score | v-score | v-score | v-score | v-score | v-score | v-score